# EAGLE board main (EAGLE 6.5.0)

Size 85.95 x 34.75 mm. Coordinates in mm from the lower left corner, seen from the top.
Outline: 0,34.75 85.95,34.75 85.95,0 0,0 0,34.75
Copper layers (1*16): Top 0.035mm / dielectric 1.5mm / Bottom 0.035mm
Design rules "default *": minimum track width 10mil, minimum drill 24mil, track to track 10mil, track to pad 10mil, pad to pad 10mil, via to via 10mil, smd to smd 10mil, copper to edge 40mil, drill to drill 8mil, minimum pad ring 10mil, minimum via ring 8mil, stop-mask expansion 4mil, vias tented up to drill 0mil, thermal gap 10mil

## Footprints (pad centres in the part's own frame; a part is rotated, then mirrored left to right if it is on the bottom)
JP1 = drill 0.914 long: 1 0,-1.27; 2 0,1.27
C1206 = smd 1.6 x 1.8: 1 -1.4,0; 2 1.4,0
C0805 = smd 1.3 x 1.5: 1 -0.85,0; 2 0.85,0
153CLV-0505 = smd 3 x 1.6: + 2.2,0; - -2.2,0
SMB = smd 2.4 x 2.4: A 2.2,0; C -2.2,0
2,8 = hole 2.8: 0,0
TO263-3 = smd 1.067 x 2.159: 1 -2.54,-5.791; 2 0,-5.791; 3 2.54,-5.791 | smd 10.8 x 10.41: TAB 0,2.54
DRV8834_PCK = smd 0.3 x 1.5: 1 -3.575,-3.25; 2 -2.925,-3.25; 3 -2.275,-3.25; 4 -1.625,-3.25; 5 -0.975,-3.25; 6 -0.325,-3.25; 7 0.325,-3.25; 8 0.975,-3.25; 9 1.625,-3.25; 10 2.275,-3.25; 11 2.925,-3.25; 12 3.575,-3.25; 13 3.575,3.25; 14 2.925,3.25; 15 2.275,3.25; 16 1.625,3.25; 17 0.975,3.25; 18 0.325,3.25; 19 -0.325,3.25; 20 -0.975,3.25; 21 -1.625,3.25; 22 -2.275,3.25; 23 -2.925,3.25; 24 -3.575,3.25 | smd 6.452 x 2.54: PAD 0,0
CHIPLED_1206 = smd 1.5 x 1.5: A 0,-1.75; C 0,1.75
CTS406 = smd 1.9 x 1.4: 1 -2.2,-1.2; 2 2.2,-1.2; 3 2.2,1.2; 4 -2.2,1.2
M1206 = smd 1.6 x 2: 1 -1.4,0; 2 1.4,0
M0805 = smd 1.3 x 1.6: 1 -0.95,0; 2 0.95,0
DTSM-6 = smd 1.55 x 1.3: 1 -3.975,2.25; 2 3.975,2.25; 3 -3.975,-2.25; 4 3.975,-2.25
255SB = drill 1.118 long: 1 -3.81,0; 2 0,0; 3 3.81,0
FE07-2 = drill 0.914: 1 -7.62,1.27 | drill 0.914 octagon: 2 -7.62,-1.27; 3 -5.08,1.27; 4 -5.08,-1.27; 5 -2.54,1.27; 6 -2.54,-1.27; 7 0,1.27; 8 0,-1.27; 9 2.54,1.27; 10 2.54,-1.27; 11 5.08,1.27; 12 5.08,-1.27; 13 7.62,1.27; 14 7.62,-1.27
FE05-1 = drill 0.813 long: 1 -5.08,0; 2 -2.54,0; 3 0,0; 4 2.54,0; 5 5.08,0
QFP50P900X900X160-48N = smd 1.041 x 0.279: 1 -4.166,2.743; 2 -4.166,2.261; 3 -4.166,1.753; 4 -4.166,1.245; 5 -4.166,0.762; 6 -4.166,0.254; 7 -4.166,-0.254; 8 -4.166,-0.762; 9 -4.166,-1.245; 10 -4.166,-1.753; 11 -4.166,-2.261; 12 -4.166,-2.743; 25 4.166,-2.743; 26 4.166,-2.261; 27 4.166,-1.753; 28 4.166,-1.245; 29 4.166,-0.762; 30 4.166,-0.254; 31 4.166,0.254; 32 4.166,0.762; 33 4.166,1.245; 34 4.166,1.753; 35 4.166,2.261; 36 4.166,2.743 | smd 0.279 x 1.041: 13 -2.743,-4.166; 14 -2.261,-4.166; 15 -1.753,-4.166; 16 -1.245,-4.166; 17 -0.762,-4.166; 18 -0.254,-4.166; 19 0.254,-4.166; 20 0.762,-4.166; 21 1.245,-4.166; 22 1.753,-4.166; 23 2.261,-4.166; 24 2.743,-4.166; 37 2.743,4.166; 38 2.261,4.166; 39 1.753,4.166; 40 1.245,4.166; 41 0.762,4.166; 42 0.254,4.166; 43 -0.254,4.166; 44 -0.762,4.166; 45 -1.245,4.166; 46 -1.753,4.166; 47 -2.261,4.166; 48 -2.743,4.166
LGA-24 = smd 0.7 x 0.29: 1 -1.875,1.25; 2 -1.875,0.75; 3 -1.875,0.25; 4 -1.875,-0.25; 5 -1.875,-0.75; 6 -1.875,-1.25; 13 1.875,-1.25; 14 1.875,-0.75; 15 1.875,-0.25; 16 1.875,0.25; 17 1.875,0.75; 18 1.875,1.25 | smd 0.29 x 0.7: 7 -1.25,-1.875; 8 -0.75,-1.875; 9 -0.25,-1.875; 10 0.25,-1.875; 11 0.75,-1.875; 12 1.25,-1.875; 19 1.25,1.875; 20 0.75,1.875; 21 0.25,1.875; 22 -0.25,1.875; 23 -0.75,1.875; 24 -1.25,1.875
MICRO_METAL_GEAR_MOTOR = drill 1: P$1 -5,1; P$2 5,1 | hole 2.8: -9,21.5; 9,21.5
MA04-1 = drill 1.016 long: 1 -3.81,0; 2 -1.27,0; 3 1.27,0; 4 3.81,0
32005-201 = smd 3.1 x 0.5: 1 3,1.6; 2 3,0.8; 3 3,0; 4 3,-0.8; 5 3,-1.6 | smd 2.5 x 2: M1 -3,-4.45; M2 -3,4.45 | smd 3.3 x 2: M3 2.9,4.45; M4 2.9,-4.45 | hole 0.9: 0,2.2; 0,-2.2

## Placement (x,y rotation side)
BOOT  [JP1]  7.72,2.03 270 top
C1  100n  [C1206]  76.81,20.83 90 top
C2  10uF  [C1206]  79.71,12.9 90 top
C3  10n  [C1206]  74.57,16.71 180 top
C4  1uF  [C1206]  77.42,12.45 90 top
C5  100n  [C0805]  71.22,13.16 180 top
C6  10uF  [C0805]  38.56,14.12 270 top
C7  22uF  [153CLV-0505]  21.44,5.69 0 top
C8  22uF  [153CLV-0505]  13.31,5.74 0 top
C9  100n  [C0805]  21.34,17.48 270 bottom
C10  10uF  [C0805]  23.11,17.48 270 bottom
C11  100n  [C0805]  21.34,14.27 90 bottom
C12  10uF  [C0805]  23.11,14.27 90 bottom
C15  100n  [C0805]  61.72,25.35 0 top
C16  22p  [C0805]  33.28,10.73 0 top
C20  22p  [C0805]  32.15,13.12 180 top
C21  18p  [C0805]  71.32,26.21 0 top
C22  18p  [C0805]  72.14,21.18 0 top
C23  4.7uF  [C0805]  56.79,2.13 90 top
C24  220n  [C0805]  54.56,3.66 270 top
C25  100n  [C0805]  46.69,25.1 0 top
C26  100n  [C0805]  51.82,7.01 180 top
C27  10uF  [C0805]  51.82,8.74 180 top
C32  4.7uF  [C0805]  39.32,18.29 270 top
D1  [SMB]  67.17,8.49 0 bottom
H1  MOUNT-HOLE2.8  [2,8]  32.39,30.48 0 top
H2  MOUNT-HOLE2.8  [2,8]  57.69,30.48 0 top
IC2  LM2937  [TO263-3]  13.41,15.9 270 bottom
IO1  DRV8834  [DRV8834_PCK]  66.52,16.39 90 bottom
JP1  2 CellLi-Pol  [JP1]  60.4,4.92 180 top
LED11  [CHIPLED_1206]  21.49,26.42 90 top
LED12  poweron  [CHIPLED_1206]  15.8,26.47 270 top
Q1  8MHz  [CTS406]  56.44,22.15 270 top
R1  47k  [M1206]  80.98,17.27 90 top
R3  47k  [M0805]  40.69,21.44 270 top
R4  47k  [M0805]  72.29,19.2 0 top
R7  22  [M0805]  31.29,15.95 90 top
R8  22  [M0805]  33.73,15.8 90 top
R9  1k5  [M0805]  36.27,16.41 270 top
R13  4k7  [M0805]  44.2,3.61 90 top
R14  4k7  [M0805]  46.18,4.42 90 top
R15  47k  [M0805]  43.08,24.89 180 top
R27  330  [M0805]  11.07,26.42 0 top
R28  330  [M0805]  26.37,26.31 0 top
RESET  DTSM-6  [DTSM-6]  80.16,30.94 180 top
S1  [255SB]  68.02,3.71 0 top
SV2  [FE07-2]  44.94,30.48 0 top
SV3  TSL1401 CAMERA  [FE05-1]  20.62,30.78 0 top
U2  STM32F103C6T6A  [QFP50P900X900X160-48N]  48.67,17.48 225 top
U3  LSM9DS0  [LGA-24]  50.39,3.35 90 top
U$1  MICRO_METAL_GEAR_MOTOR  [MICRO_METAL_GEAR_MOTOR]  60.45,16.51 270 top
U$2  MICRO_METAL_GEAR_MOTOR  [MICRO_METAL_GEAR_MOTOR]  25.6,16.36 90 top
UART  [MA04-1]  8.31,30.65 180 top
USER  DTSM-6  [DTSM-6]  69.49,31.04 180 top
X1  MINI-USB-32005-201  [32005-201]  31.21,4.4 90 top

## Library data of the parts
BOOT JP1 = jumper
C1-C12 C15 C16 C20-C27 C32 R1 R3 R4 R7-R9 R13-R15 R27 R28 = resistor
D1 = diode
H1 H2 = holes
IC2 = linear
IO1 = yellow_car
LED11 LED12 = led
Q1 = crystal; OC_FARNELL: unknown; OC_NEWARK: unknown
RESET USER = switch-tact
S1 = switch
SV2 SV3 = con-lsta; OC_FARNELL: unknown; OC_NEWARK: unknown
U2 = stm32f103_lqfp48; MPN: STM32F103C6T6A; OC_FARNELL: 1972391; OC_NEWARK: 72T2643; PACKAGE: 48LQFP; SUPPLIER: STMicroelectronics
U3 = SparkFun-DigitalIC
U$1 U$2 = pololu
UART = con-lstb; OC_FARNELL: unknown; OC_NEWARK: unknown
X1 = con-cypressindustries; OC_FARNELL: unknown; OC_NEWARK: unknown

## Nets
+3V3: BOOT.1 C5.1 C6.1 C8.+ C11.1 C12.1 C15.1 C26.2 C27.2 IC2.3 R3.1 R9.1 R13.2 R14.2 R15.2 R27.1 SV2.14 SV3.2 U2.9 U2.24 U2.36 U2.48 U3.15 U3.16 U3.17 U3.18 U3.19 U3.20 UART.1
ADC0: SV2.10 U2.10
ADC1: SV2.9 U2.11
ADC2: SV2.8 U2.12
ADC3: SV2.7 U2.13
ADC4: SV2.5 U2.14
ADC5: SV2.4 U2.15
ADC6: SV2.3 U2.16
ADC7: SV2.2 U2.17
ADC8: SV2.6 U2.18
ADC9: U2.19
AENBL: IO1.10 U2.26
APHASE: IO1.13 U2.41
BATT: D1.C JP1.2 S1.1 S1.2
BENBL: IO1.11 U2.27
BPHASE: IO1.12 U2.38
CAM_AO: SV3.3 U2.25
CAM_CLK: SV3.4 U2.45
CAM_SI: SV3.5 U2.21
GND: C1.2 C2.2 C4.1 C5.2 C6.2 C7.- C8.- C9.2 C10.2 C11.2 C12.2 C15.2 C16.2 C20.1 C21.2 C22.2 C23.1 C25.1 C26.1 C27.1 C32.2 IC2.2 IO1.2 IO1.3 IO1.5 IO1.8 IO1.15 IO1.21 IO1.PAD JP1.1 LED11.C LED12.C R4.2 RESET.1 RESET.2 SV2.12 SV3.1 U2.8 U2.20 U2.23 U2.35 U2.47 U3.2 U3.3 U3.4 U3.5 U3.6 U3.22 U3.23 UART.4 USER.1 USER.2 X1.5
IR_CONTROLL: SV2.1 U2.29
LED_1: R28.2 U2.28
M1: IO1.14 U2.40
N$1: IO1.4 U$1.P$1
N$2: IO1.6 U$1.P$2
N$3: IO1.9 U$2.P$1
N$4: IO1.7 U$2.P$2
N$5: C3.2 IO1.17
N$6: C23.2 U3.7
N$7: C24.2 U3.8
N$8: IO1.22 IO1.23 IO1.24
N$9: IO1.1 R1.2
N$13: C24.1 U3.9
N$14: C32.1 U2.22
N$16: BOOT.2 R4.1 U2.44
N$22: C4.2 IO1.20
N$23: LED12.A R27.2
N$33: LED11.A R28.1
N$55: C20.2 R7.1 X1.2
N$56: C16.1 R8.1 X1.3
N$57: D1.A X1.1
OSCIN: C22.1 Q1.3 U2.5
OSCOUT: C21.1 Q1.1 U2.6
RESET: C25.2 R15.1 RESET.3 RESET.4 U2.7
SCL: R14.1 U2.42 U3.21
SDA: R13.1 U2.43 U3.24
SWCLK: U2.37
SWDIO: U2.34
UART_RX: U2.31 UART.2
UART_TX: U2.30 UART.3
USBDM: R7.2 U2.32
USBDP: R8.2 R9.2 U2.33
USER_KEY_1: R3.2 U2.46 USER.3
VBAT: U2.1
VCC: C1.1 C2.1 C3.1 C7.+ C9.1 C10.1 IC2.1 IO1.18 IO1.19 R1.1 S1.3

## Tracks (layer width: path | path; a pad name or v marks a point on that pad's centre or on a via)
+3V3  (28 unrouted)
ADC0  (1 unrouted)
ADC1  (1 unrouted)
ADC2  (1 unrouted)
ADC3  (1 unrouted)
ADC4  (1 unrouted)
ADC5  (1 unrouted)
ADC6  (1 unrouted)
ADC7  (1 unrouted)
ADC8  (1 unrouted)
AENBL  (1 unrouted)
APHASE  (1 unrouted)
BATT  (3 unrouted)
BENBL  (1 unrouted)
BPHASE  (1 unrouted)
CAM_AO  (1 unrouted)
CAM_CLK  (1 unrouted)
CAM_SI  (1 unrouted)
GND  (52 unrouted)
IR_CONTROLL  (1 unrouted)
LED_1  (1 unrouted)
M1  (1 unrouted)
N$1  (1 unrouted)
N$2  (1 unrouted)
N$3  (1 unrouted)
N$4  (1 unrouted)
N$5  (1 unrouted)
N$6  (1 unrouted)
N$7  (1 unrouted)
N$8  (2 unrouted)
N$9  (1 unrouted)
N$13  (1 unrouted)
N$14  (1 unrouted)
N$16  (2 unrouted)
N$22  (1 unrouted)
N$23  (1 unrouted)
N$33  (1 unrouted)
N$55  (2 unrouted)
N$56  (2 unrouted)
N$57  (1 unrouted)
OSCIN  (2 unrouted)
OSCOUT  (2 unrouted)
RESET  (4 unrouted)
SCL  (2 unrouted)
SDA  (2 unrouted)
UART_RX  (1 unrouted)
UART_TX  (1 unrouted)
USBDM  (1 unrouted)
USBDP  (2 unrouted)
USER_KEY_1  (2 unrouted)
VCC  (10 unrouted)
(copper drawn outside any net)
  shapes: Top area x2